# Altium PCB PowerLatch.PcbDoc
Units mm, origin at the board's own origin, x right, y up, seen from the top; angles counter-clockwise.
Board outline 76 x 30 mm, 2 copper layers (Top Layer, Bottom Layer); 34 components, 17 nets, 83 pads, 0 vias.
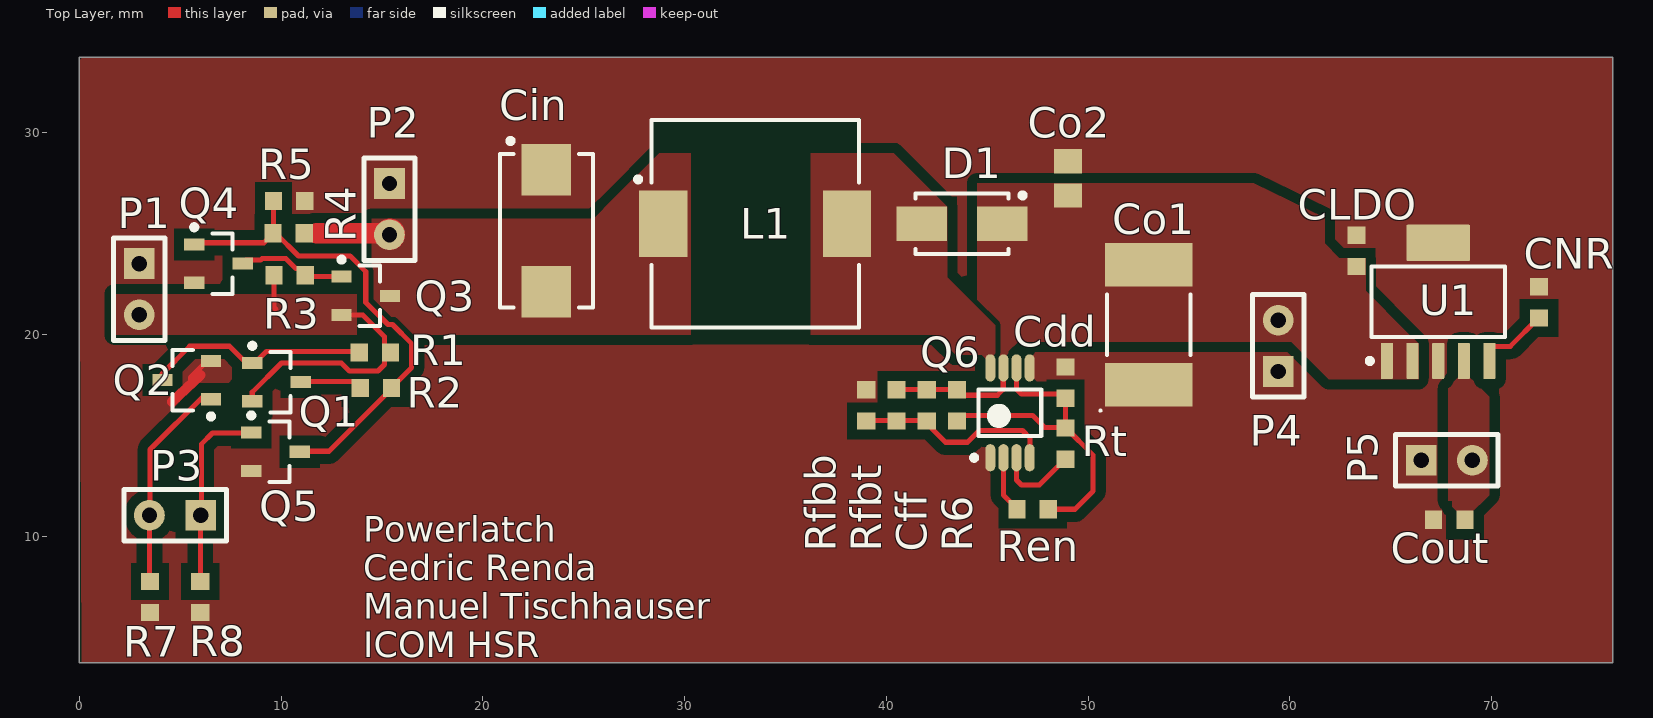
[diagram p0: Top Layer view]
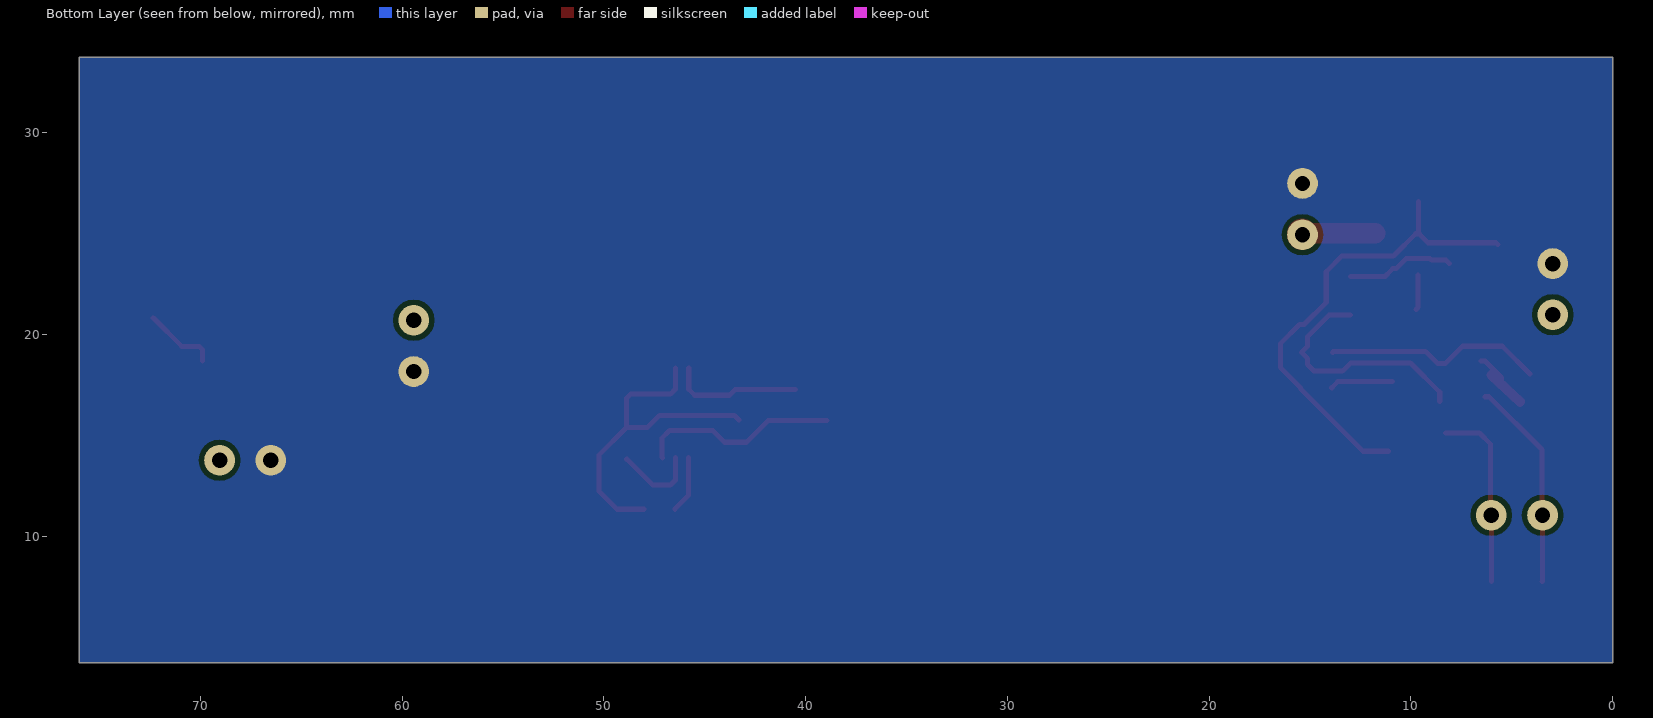
[diagram p1: Bottom Layer view, seen from below]
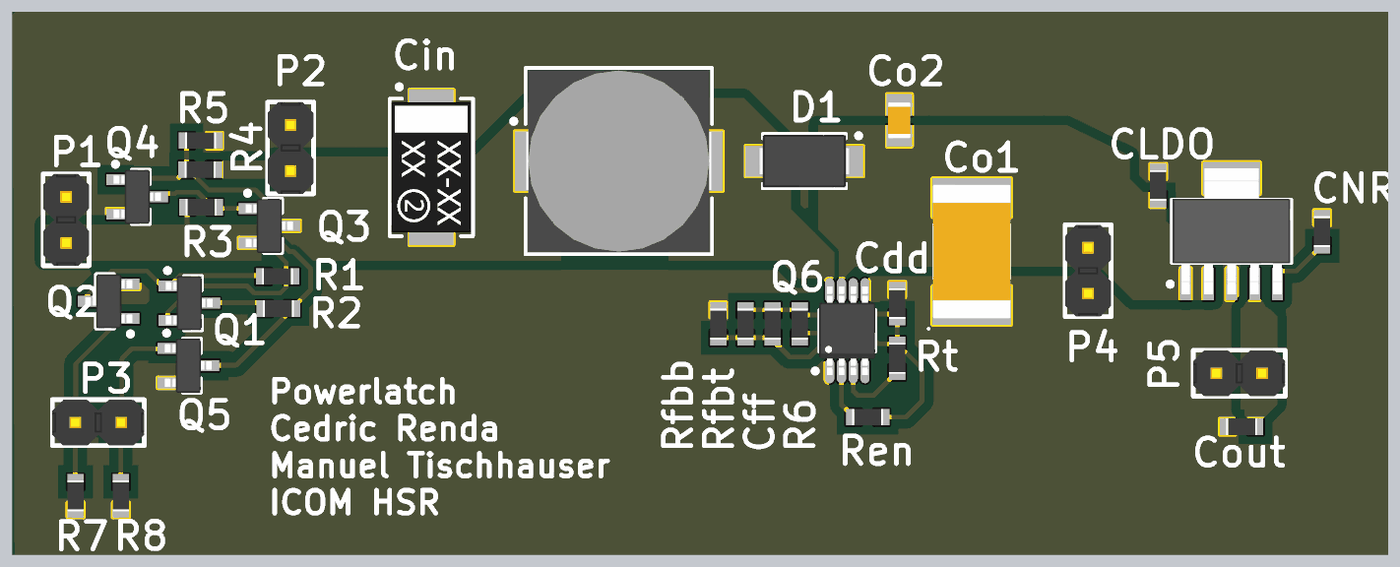
[diagram p2: 3D render of the assembled board from above, using the file's embedded part models]

## Layer stack, top to bottom
Top Solder: solder mask 0.0102, Solder Resist, Dk 3.5
Top Layer: signal copper 0.0356
Dielectric 1: dielectric 0.32, FR-4, Dk 4.8
Bottom Layer: signal copper 0.0356
Bottom Solder: solder mask 0.0102, Solder Resist, Dk 3.5

## Board outline
0,3.75 76,3.75 76,33.75 0,33.75

## Design rules (kind name [scope] priority, off if disabled: settings)
Clearance "GND Distance" [InNamedPolygon('Top Layer-GND')] p1: gap=0.508 ignorepadtopadclearanceinfootprint=FALSE
Clearance Clearance_3 [InNamedPolygon('Top Layer-NetCout_2')] p2: gap=0.5 ignorepadtopadclearanceinfootprint=FALSE
Clearance [InComponent('Q6')] p3: gap=0.254 ignorepadtopadclearanceinfootprint=TRUE except(0: Arc-Hole Track-Hole SMDPad-Hole THPad-Hole Via-Hole Fill-Hole Poly-Hole Region-Hole Text-Hole; 0.127: Arc-SMDPad Track-SMDPad SMDPad-SMDPad)
Clearance Clearance_1 [All] p4: gap=0.254 ignorepadtopadclearanceinfootprint=FALSE except(0: Arc-Hole Track-Hole SMDPad-Hole THPad-Hole Via-Hole Fill-Hole Poly-Hole Region-Hole Text-Hole)
Clearance Clearance_2 [InPolygon] p5: gap=0.508 ignorepadtopadclearanceinfootprint=FALSE
ComponentClearance [All] p1: gap=0 collisioncheckmode=3 verticalgap=0 showdistances=TRUE
PolygonConnect Poly1 [All] p1: connectstyle=Direct reliefconductorwidth=0.254 reliefentries=4 polygonreliefangle="90 Angle" airgapwidth=0.254
PolygonConnect PolygonConnect_4 [All vs IsNamedPolygon('Top Layer-NetCout_2')] p2: connectstyle=Direct reliefconductorwidth=0.254 reliefentries=4 polygonreliefangle="90 Angle" airgapwidth=0.254
PolygonConnect PolygonConnect_3 [All vs IsNamedPolygon('Top Layer-NetD1_1')] p3: connectstyle=Direct reliefconductorwidth=0.254 reliefentries=4 polygonreliefangle="90 Angle" airgapwidth=0.254
PolygonConnect Poly2 [All vs IsNamedPolygon('Top Layer-NetD1_1')] p4: connectstyle=Direct reliefconductorwidth=0.254 reliefentries=4 polygonreliefangle="90 Angle" airgapwidth=0.254
PolygonConnect PolygonConnect_2 [All vs IsNamedPolygon('Top Layer-NetCff_1')] p5: connectstyle=Direct reliefconductorwidth=0.254 reliefentries=4 polygonreliefangle="90 Angle" airgapwidth=0.254
PolygonConnect PolygonConnect_1 [All vs IsNamedPolygon('NETCIN_1_L01_P016')] p6: connectstyle=Direct reliefconductorwidth=0.254 reliefentries=4 polygonreliefangle="90 Angle" airgapwidth=0.254
PolygonConnect [All vs IsNamedPolygon('NETP1_1_L01_P012')] p7: connectstyle=Direct reliefconductorwidth=0.254 reliefentries=4 polygonreliefangle="90 Angle" airgapwidth=0.254
RoomDefinition PowerLatch [InComponentClass('PowerLatch')] p1: confinementstyle=ConfineIn formatcopy=TRUE lockcomponents=FALSE outline 0.125,3.75 76,3.75 76,33.75 0.125,33.75
RoutingVias [All] p1: holewidth=0.711 width=1.27 viastyle="Through Hole" minholewidth=0.711 minwidth=1.27 maxholewidth=0.711 maxwidth=1.27
SolderMaskExpansion [All] p1: expansion=0.102
Width [All] p1: maxlimit=100 minlimit=0.127 preferedwidth=0.254
29 further rules are at their usual default settings.

## Components (designator, comment, footprint, x,y, rotation, side; value= is the part's Value field where it differs from the comment)
Cdd "Cap" RESC1608X06N 48.877,17.627 r270 top value=1u
Cff "Cap" RESC1608X06N 42,16.5 r270 top value=39pF
Cin "Cap" CAPMP7343X31N 23.15,25.15 r90 top value=22uF
CLDO "Cap" RESC1608X06N 63.3,24.15 r270 top value=1u
CNR "Cap" RESC1608X06N 72.35,21.6 r270 top value=0.01u
Co1 "Cap" CAP2812 53,20.5 r270 top value=68u
Co2 "Cap" CAPC0805 49,27.75 r270 top value=1u
Cout "Cap" RESC1608X06N 67.9,10.825 r0 top value=1u
D1 "Schottky" DIOM4326X23N 43.75,25.5 r0 top
L1 "Inductor" INDP100100X51N 33.5,25.5 r0 top
P1 "Header 2" PCBComponent_1 2.975,22.255 r90 top
P2 "Header 2" PCBComponent_1 15.375,26.225 r90 top
P3 "Header 2" PCBComponent_1 4.75,11.05 r0 top
P4 "Header 2" PCBComponent_1 59.425,19.445 r270 top
P5 "Header 2" PCBComponent_1 67.775,13.775 r180 top
Q1 "MOSFET P-Channel" SOT95P245X110-3N 9.775,17.65 r0 top
Q2 "MOSFET N-Channel" SOT95P245X110-3N 5.325,17.75 r180 top
Q3 "MOSFET P-Channel" SOT95P245X110-3N 14.2,21.925 r0 top
Q4 "MOSFET N-Channel" SOT95P245X110-3N 6.9,23.525 r0 top
Q5 "MOSFET N-Channel" SOT95P245X110-3N 9.725,14.2 r0 top
Q6 "LMR61428" TSOP65P490X110-8N 46.127,16.127 r90 top
R1 "Res1" RESC1608X06N 14.65,19.125 r0 top value=10K
R2 "Res1" RESC1608X06N 14.7,17.35 r180 top value=1K
R3 "Res1" RESC1608X06N 10.425,22.95 r180 top value=100K
R4 "Res1" RESC1608X06N 10.375,25.025 r0 top value=1K
R5 "Res1" RESC1608X06N 10.4,26.625 r180 top value=1M
R6 "Res1" RESC1608X06N 43.5,16.5 r270 top value=50
R7 "Res1" RESC1608X06N 3.5,7 r90 top value=1M
R8 "Res1" RESC1608X06N 6,7 r90 top value=1M
Ren "Res1" RESC1608X06N 47.25,11.35 r0 top value=10K
Rfbb "Res1" RESC1608X06N 39,16.5 r90 top value=50K
Rfbt "Res1" RESC1608X06N 40.5,16.5 r90 top value=150K
Rt "Res1" RESC1608X06N 48.877,14.602 r90 top value=200K
U1 "TPS79533DCQ" DCQ0006A_L 67.35,21.625 r90 top

## Footprints (in the part's own frame and the unit in brackets; to place one, negate y for a bottom-side part, rotate by r counter-clockwise, add the part's x,y. Pads: shape width x height; smd on the part's side, far side on the other; paste and mask are expansions set on the pad)
CAP2812 [mm] "Chip Capacitor, 2-Leads, Body 7.10x4.15mm, IPC Medium Density"
  rect 2.15x4.35 smd: 1(-2.975,0) 2(2.975,0)
  silkscreen extent -1.5,-2.44 4.31,2.07, body extent -3.7,-2.15 3.7,2.15, height 3.1
CAPC0805 [mm]
  rect 1.2x1.4 smd: 1(-0.85,0) 2(0.85,0)
  body extent -1,-0.63 1,0.63, height 1.4
CAPMP7343X31N [mm] "Molded Capacitor, 2-Leads, Body 7.30x4.30mm, IPC Medium Density"
  rect 2.55x2.45 smd: 1(-3.025,0) 2(3.025,0)
  silkscreen extent -3.8,-2.3 4.57,2.3, body extent -3.59,-2.2 3.6,2.22, height 2.86
DCQ0006A_L [mm] "SOT223, 6-Leads, Body 6.55x3.55mm, Pitch 1.27mm, IPC High Density"
  rrect17% 1.8x0.6 smd: 1(-2.925,2.54) 2(-2.925,1.27) 3(-2.925,0) 4(-2.925,-1.27) 5(-2.925,-2.54)
  rrect6% 1.8x3.15 smd: 6(2.925,0)
  silkscreen extent -3.05,-3.3 1.75,3.51, body extent -3.48,-3.25 3.48,3.25, height 1.64
DIOM4326X23N [mm] "Molded Diode, 2-Leads, Body 4.30x2.61mm, IPC Medium Density"
  rect 2.5x1.7 smd: 1(-2,0) 2(2,0)
  silkscreen extent -2.3,-1.5 3.13,1.52, body extent -2.52,-1.46 2.52,1.46, height 2.3
INDP100100X51N [mm] "Precision Wire Wound Inductor, 2-Leads, Body 10.00x10.00mm, IPC Medium Density"
  rect 2.4x3.3 smd: 1(-4.55,0) 2(4.55,0)
  silkscreen extent -5.92,-5.15 5.15,5.15, body extent -5.1,-5 5.1,5, height 5.2
PCBComponent_1 [mil]
  round 60 hole 30: 1(-50,0)
  rect 60x60 / inner round 60 / far side round 60 hole 30: 2(50,0)
  silkscreen extent -100,-50 100,50, body extent -100,-50 100,50, height 343
RESC1608X06N [mm] "Chip Resistor, 2-Leads, Body 1.60x0.80mm, IPC Medium Density"
  rect 0.85x0.9 smd: 1(-0.775,0) 2(0.775,0)
  body extent -0.85,-0.45 0.85,0.45, height 0.55
SOT95P245X110-3N [mm] "SOT23, 3-Leads, Body 2.90x2.45mm, Pitch 0.95mm, IPC Medium Density"
  rect 1x0.6 smd: 1(-1.2,0.95) 2(-1.2,-0.95) 3(1.2,0)
  silkscreen extent -1.32,-1.5 0.7,1.92, body extent -1.3,-1.5 1.3,1.5, height 1.1
TSOP65P490X110-8N [mm] "TSOP, 8-Leads, Body 3.00x3.00mm, Pitch 0.65mm, IPC Medium Density"
  oval 1.35x0.5 smd: 1(-2.225,0.975) 2(-2.225,0.325) 3(-2.225,-0.325) 4(-2.225,-0.975) 5(2.225,-0.975) 6(2.225,-0.325) 7(2.225,0.325) 8(2.225,0.975)
  silkscreen extent -2.35,-1.55 1.15,1.9, body extent -2.45,-1.55 2.45,1.55, height 1.1

## Part data
Cdd Cff Cin CLDO CNR Co1 Co2 Cout: "Capacitor", LatestRevisionDate=17-Jul-2002, LatestRevisionNote="Re-released for DXP Platform.", PackageDescription="Radial Cap, Thru-Hole; 2 Leads; 0.3 in Pin Spacing", PackageReference=RAD-0.3, Published=8-Jun-2000, Publisher="Altium Limited"
P1 P2 P3 P4 P5: "Header, 2-Pin", LatestRevisionDate=17-Jul-2002, LatestRevisionNote="Re-released for DXP Platform.", Publisher="Altium Limited"
Q6: "Step-Up Voltage Regulator"
R1 R2 R3 R4 R5 R6 R7 R8 Ren Rfbb Rfbt Rt: "Resistor", LatestRevisionDate=17-Jul-2002, LatestRevisionNote="Re-released for DXP Platform.", PackageDescription="Axial Device, Thru-Hole; 2 Leads; 0.3 in Pin Spacing", PackageReference=AXIAL-0.3, Published=8-Jun-2000, Publisher="Altium Limited"
U1: library part CMP-0395-00363-2, "Single Output High PSRR LDO, 500 mA, Fixed 3.3 V Output, 2.7 to 5.5 V Input, 6-pin SOT-223 (DCQ), Green (RoHS & no Sb/Br)", Manufacturer="Texas Instruments", Rating=Catalog, Accuracy(%)=2, ComponentLink1Description="Manufacturer URL", ComponentLink1URL=http://www.ti.com/, ComponentLink2Description=Datasheet, ComponentLink2URL=http://www.ti.com/general/docs/lit/getliterature.tsp?genericPartNumber=TPS79533&fileType=pdf, ComponentLink3Description="Package Specification", ComponentLink3URL=http://www.ti.com/litv/pdf/mpds098c, DatasheetVersion=SLVS350H, Eco-Plan="Green (RoHS & no Sb/Br)", Fixed Output Options(V)=3.3, Iout(Max)(A)=0.5, Iq(Typ)(mA)=0.26, Mounting Technology="Surface Mount", PackageDescription="6-Pin Plastic Small Outline, Body 3.5 x 6.5 mm, Pitch 1.27 mm", PackageReference=DCQ0006A, PackageVersion=4202109/D, PartNumber=TPS79533DCQ, SubFamily="Single Channel LDO", Vdo(Typ)(mV)=105, Vin(Max)(V)=5.5, Vin(Min)(V)=2.7, Vout Adj(Max)(V)=3.3, Vout Adj(Min)(V)=3.3

## Nets (pads, with @x,y where several pads share a name; then routed paths per layer and width w, separated by ;. In a path a pad name is that pad's centre, name@x,y a point inside that pad or via, vN(x,y) a via of type N, cw(c..) or ccw(c..) an arc to the next point about the centre after c; other vN are vias at no path point)
GND: Cdd.1 Cin.2 CLDO.1 CNR.1 Co1.2 Co2.1 Cout.1 P1.2 P2.2 P4.2 P5.2 Q2.2 Q4.2 Q5.2 Q6.1 Q6.5 R5.1 R7.1 R8.1 Rfbb.2 U1.3 U1.6 | length 3.6
  Top Layer w0.254: 5.51,17.584 5.51,17.885 6.325,18.7 Q2.2
  Top Layer w0.5: 4.6,16.675 6,18
NetCdd_2: Cdd.2 Q6.6 R6.2 Ren.2 Rt.2 | length 17.4
  Top Layer w0.254: R6.2@43.298,15.773 43.525,16 47.25,16 47.848,15.402 Rt.2@48.877,15.402 ; Q6.6 46.452,17.302 46.702,17.052 48.677,17.052 Cdd.2 Rt.2@48.877,15.402 ; Ren.2 49.35,11.35 50.25,12.25 50.25,14.029 Rt.2@48.877,15.402
NetCff_1: Cff.1 CLDO.2 Co1.1 Co2.2 D1.2 P4.1 Q6.7 R6.1 Rfbt.2 U1.1 U1.2 | length 6.6
  Top Layer w0.254: Rfbt.2 Cff.1 R6.1 43.775,17 45.5,17 45.796,17.296 45.796,18.346 Q6.7
NetCff_2: Cff.2 Q6.4 Rfbb.1 Rfbt.1 | length 10
  Top Layer w0.254: Rfbb.1@38.948,15.75 40.95,15.75 41.855,15.75 42.936,14.669 44.025,14.669 44.606,15.25 46.75,15.25 47.127,14.873 47.127,13.927 Q6.4
NetCin_1: Cin.1 L1.1 P2.1 Q3.3 R4.2 | length 3.8
  Top Layer w0.254: P2.1@15.185,25.025 15.285,25.125 P2.1@15.4,25.01
  Top Layer w1: 11.75,25.025 14.015,25.025 P2.1@15.185,25.025
  Top Layer w1.5: P2.1@15.4,24.95 P2.1@15.4,25.01
NetCNR_2: CNR.2 U1.5 | length 3.7
  Top Layer w0.254: U1.5 69.89,19.249 70.063,19.422 70.922,19.422 72.325,20.825 CNR.2
NetCout_2: Cout.2 P5.1 U1.4
NetD1_1: D1.1 L1.2 Q6.8
NetP1_1: P1.1 Q1.2 Q3.2 R1.2 R3.2 | length 13.9
  Top Layer w0.254: P1.1@2.9,20.935 P1.1@2.94,20.975 ; Q1.2 8.575,17.15 10.025,18.6 12.986,18.6 13.386,18.2 14.801,18.2 15.127,18.526 15.127,18.827 R1.2 15.127,19.423 15.127,19.898 14.05,20.975 Q3.2 ; R3.2 9.65,21.35 9.75,21.25
NetP3_1: P3.1 Q2.1 R7.2 | length 10.3
  Top Layer w0.254: P3.1 3.48,7.795 R7.2 ; P3.1@3.51,11.2 3.51,14.31 6.127,16.927 Q2.1@6.327,16.927
NetP3_2: P3.2 Q5.1 R8.2 | length 9.1
  Top Layer w0.254: R8.2 6,11.03 P3.2 ; P3.2@6.05,11.2 6.05,14.575 6.6,15.125 Q5.1@8.275,15.125
NetQ1_1: Q1.1 Q2.3 R1.1 | length 11
  Top Layer w0.254: 4.1,18.05 5.477,19.427 7.448,19.427 8.3,18.575 8.675,18.575 9.275,19.175 13.85,19.175 13.85,19.15 R1.1
NetQ1_3: Q1.3 R2.2 | length 3.1
  Top Layer w0.254: Q1.3@10.925,17.673 13.627,17.673 13.925,17.375 R2.2
NetQ3_1: Q3.1 Q4.3 R3.1 | length 5.4
  Top Layer w0.254: Q4.3 8.27,23.695 8.981,23.695 9.067,23.781 10.233,23.781 10.741,23.273 10.902,23.273 11.2,22.975 R3.1 11.275,22.875 Q3.1
NetQ4_1: Q4.1 Q5.3 R2.1 R4.1 R5.2 | length 24
  Top Layer w0.254: Q4.1 5.783,24.558 9.158,24.558 R4.1@9.6,25 ; R5.2@9.625,26.6 9.625,25.05 R4.1 R4.1@9.6,25 ; Q5.3@11.125,14.225 12.375,14.225 15.475,17.325 R2.1 15.475,17.375 16.475,18.375 16.475,19.55 15.525,20.5 15.301,20.5 14.2,21.601 14.2,23.125 13.425,23.9 10.861,23.9 9.761,25 R4.1@9.6,25
NetQ6_2: Q6.2 Ren.1 | length 2.8
  Top Layer w0.254: Q6.2 45.802,12.048 46.475,11.375 Ren.1
NetQ6_3: Q6.3 Rt.1 | length 4.2
  Top Layer w0.254: Q6.3 46.452,12.802 46.702,12.552 47.577,12.552 48.852,13.827 Rt.1

## Polygon pours and split planes (outlines as drawn)
GND on Top Layer "Top Layer-GND" (solid, remove dead copper, pour order 26): 0,33.75 76,33.75 76,3.75 38.75,3.75 38.75,30.75 28.35,30.75 28.35,19.5 38.75,19.5 38.75,3.75 0.125,3.75
NetCout_2 on Top Layer "Top Layer-NetCout_2" (solid, pour order 22): 68.325,17.875 67.85,17.4 67.85,11.675 68.45,11.075 68.9,11.075 69.875,12.05 69.875,16.925 68.925,17.875
NetCff_1 on Top Layer "Top Layer-NetCff_1" (solid, pour order 20): 61.725,24.525 62.45,23.8 63.75,23.8 63.75,22.175 65.75,20.175 66.375,19.55 66.375,17.8 61.925,17.8 60.075,19.65 52.65,19.65 46.525,19.65 46.05,19.175 46.05,18.125 45.55,18.125 45.55,20.55 44.5,21.6 44.5,27.5 58.214,27.5 61.725,25.8
NetD1_1 on Top Layer "Top Layer-NetD1_1" (solid, remove dead copper, pour order 18): 36.25,29 36.25,20 42.45,20 43.45,19 44.725,19 44.925,18.8 45.4,18.8 45.4,20.475 43.025,22.85 43.025,26.35 40.375,29
NetCin_1 on Top Layer "NETCIN_1_L01_P016" (solid, pour order 16): 14.5,25.75 14.5,21.75 15.5,20.75 15.75,20.75 16.5,20 30.308,20 30.308,29 28.75,29 26.5,26.75 25.5,25.75
no net on Top Layer "Top Layer-No Net" (solid, pour order 14): 14.7,21.925
NetP1_1 on Top Layer "NETP1_1_L01_P012" (solid, pour order 12): 1.75,22 1.75,20 13.75,20 13.75,21 13.75,22
GND on Bottom Layer (solid, pour order 28): 0,33.75 76,33.75 76,3.75 0,3.75

## Silkscreen, mask and mechanical layers (free items; w line width, h text height)
Top Overlay:
  text "Powerlatch / Cedric Renda / Manuel Tischhauser / ICOM HSR" at 14.075,4.025 h1.27
Mechanical 15:
  the board outline again, w0.254